# Altium PCB PCB_Project_Board_3.PcbDoc
Units mil, origin at the board's own origin, x right, y up, seen from the top; angles counter-clockwise.
Board outline 3900 x 3900 mil, 2 copper layers (Top Layer, Bottom Layer); 64 components, 47 nets, 263 pads, 57 vias.
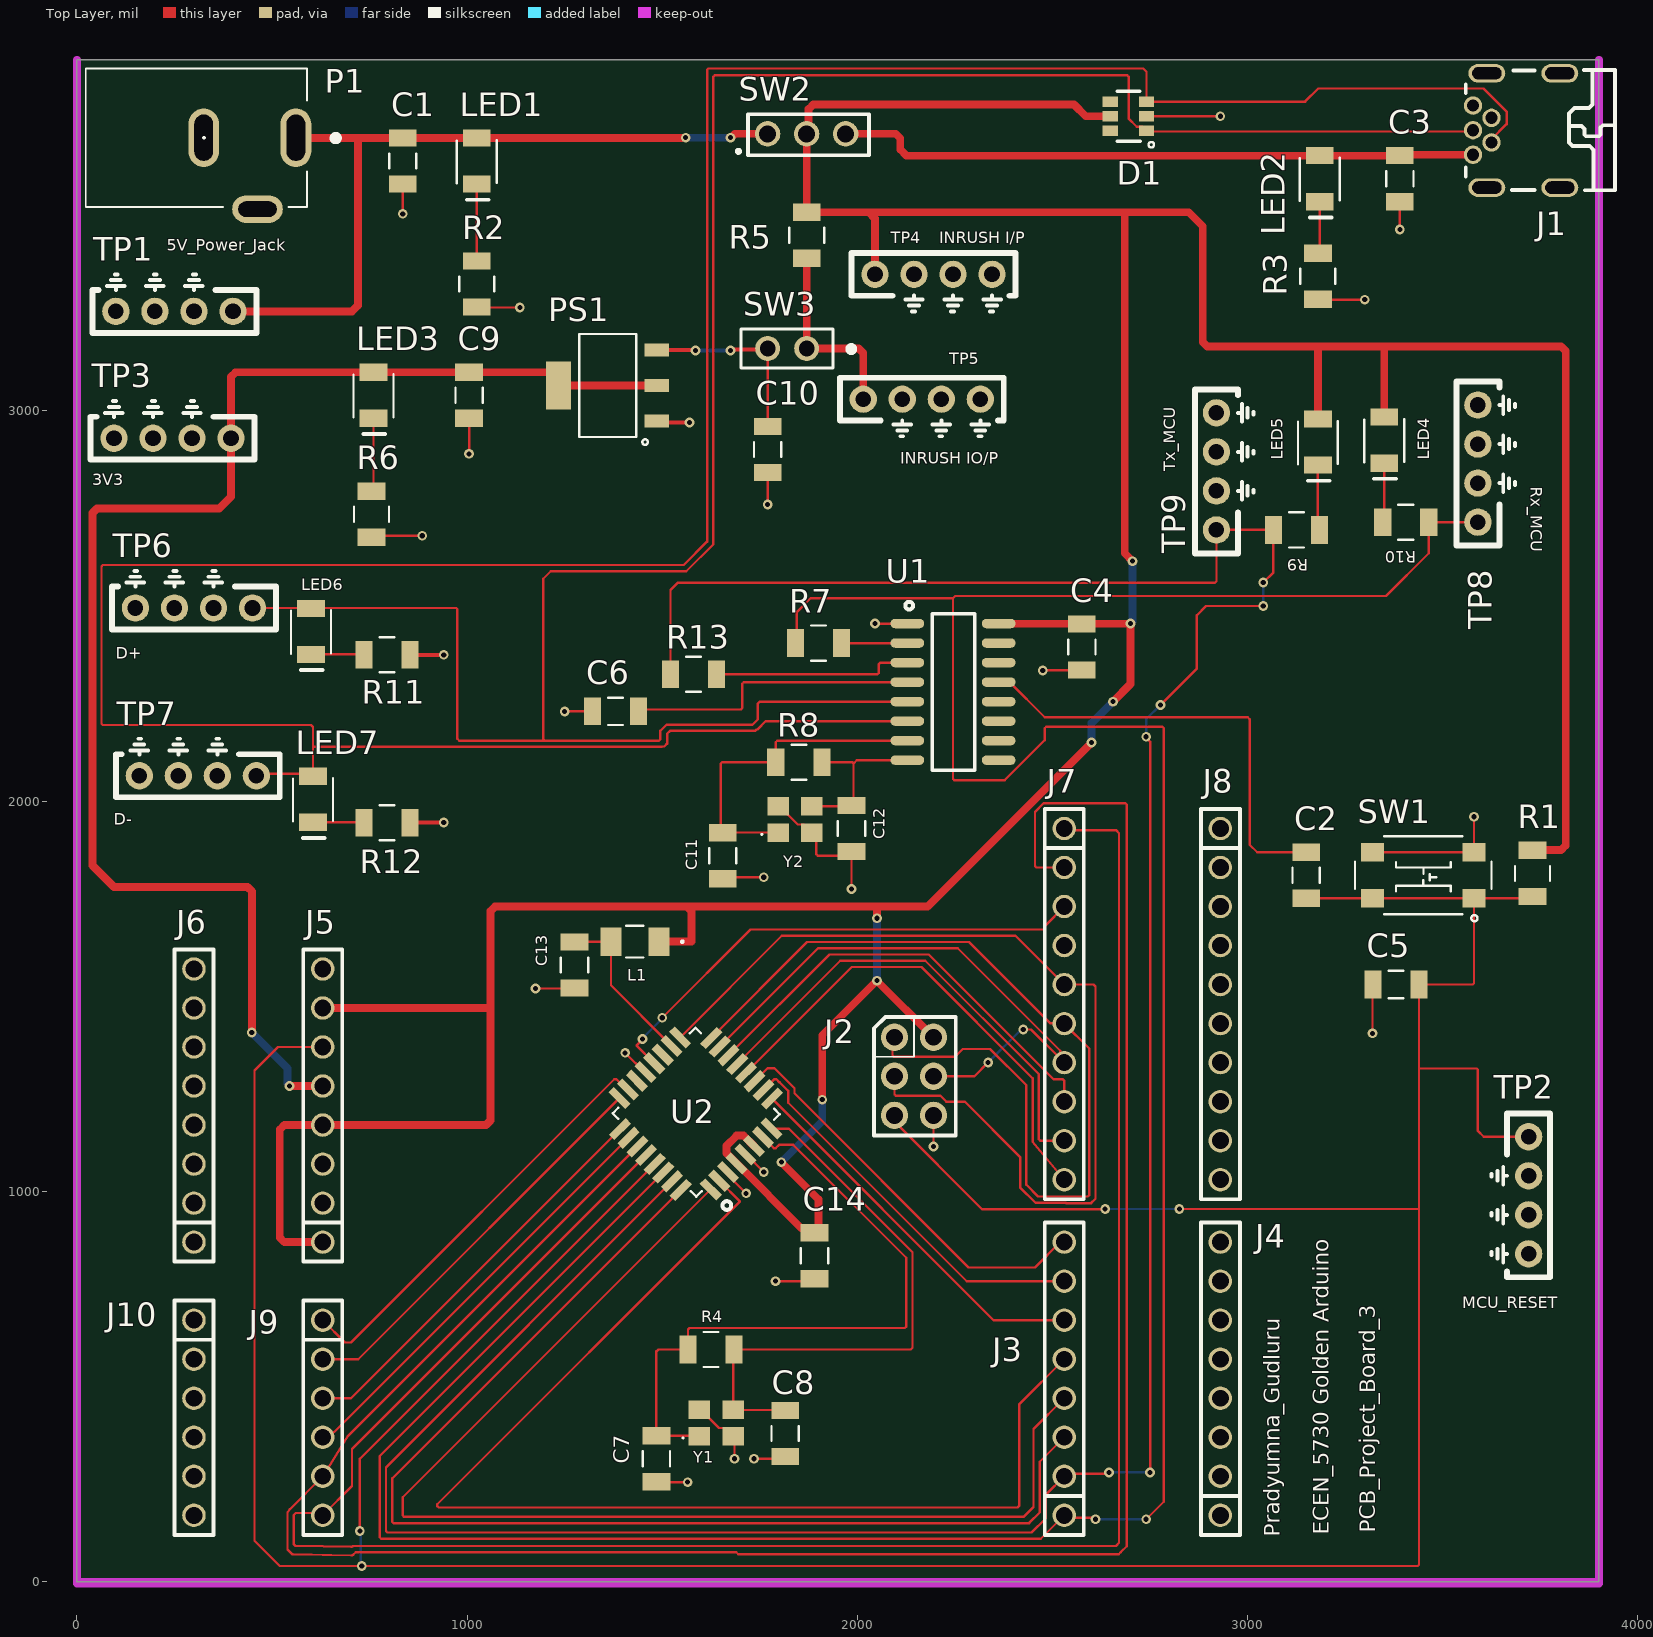
[diagram p0: Top Layer view]
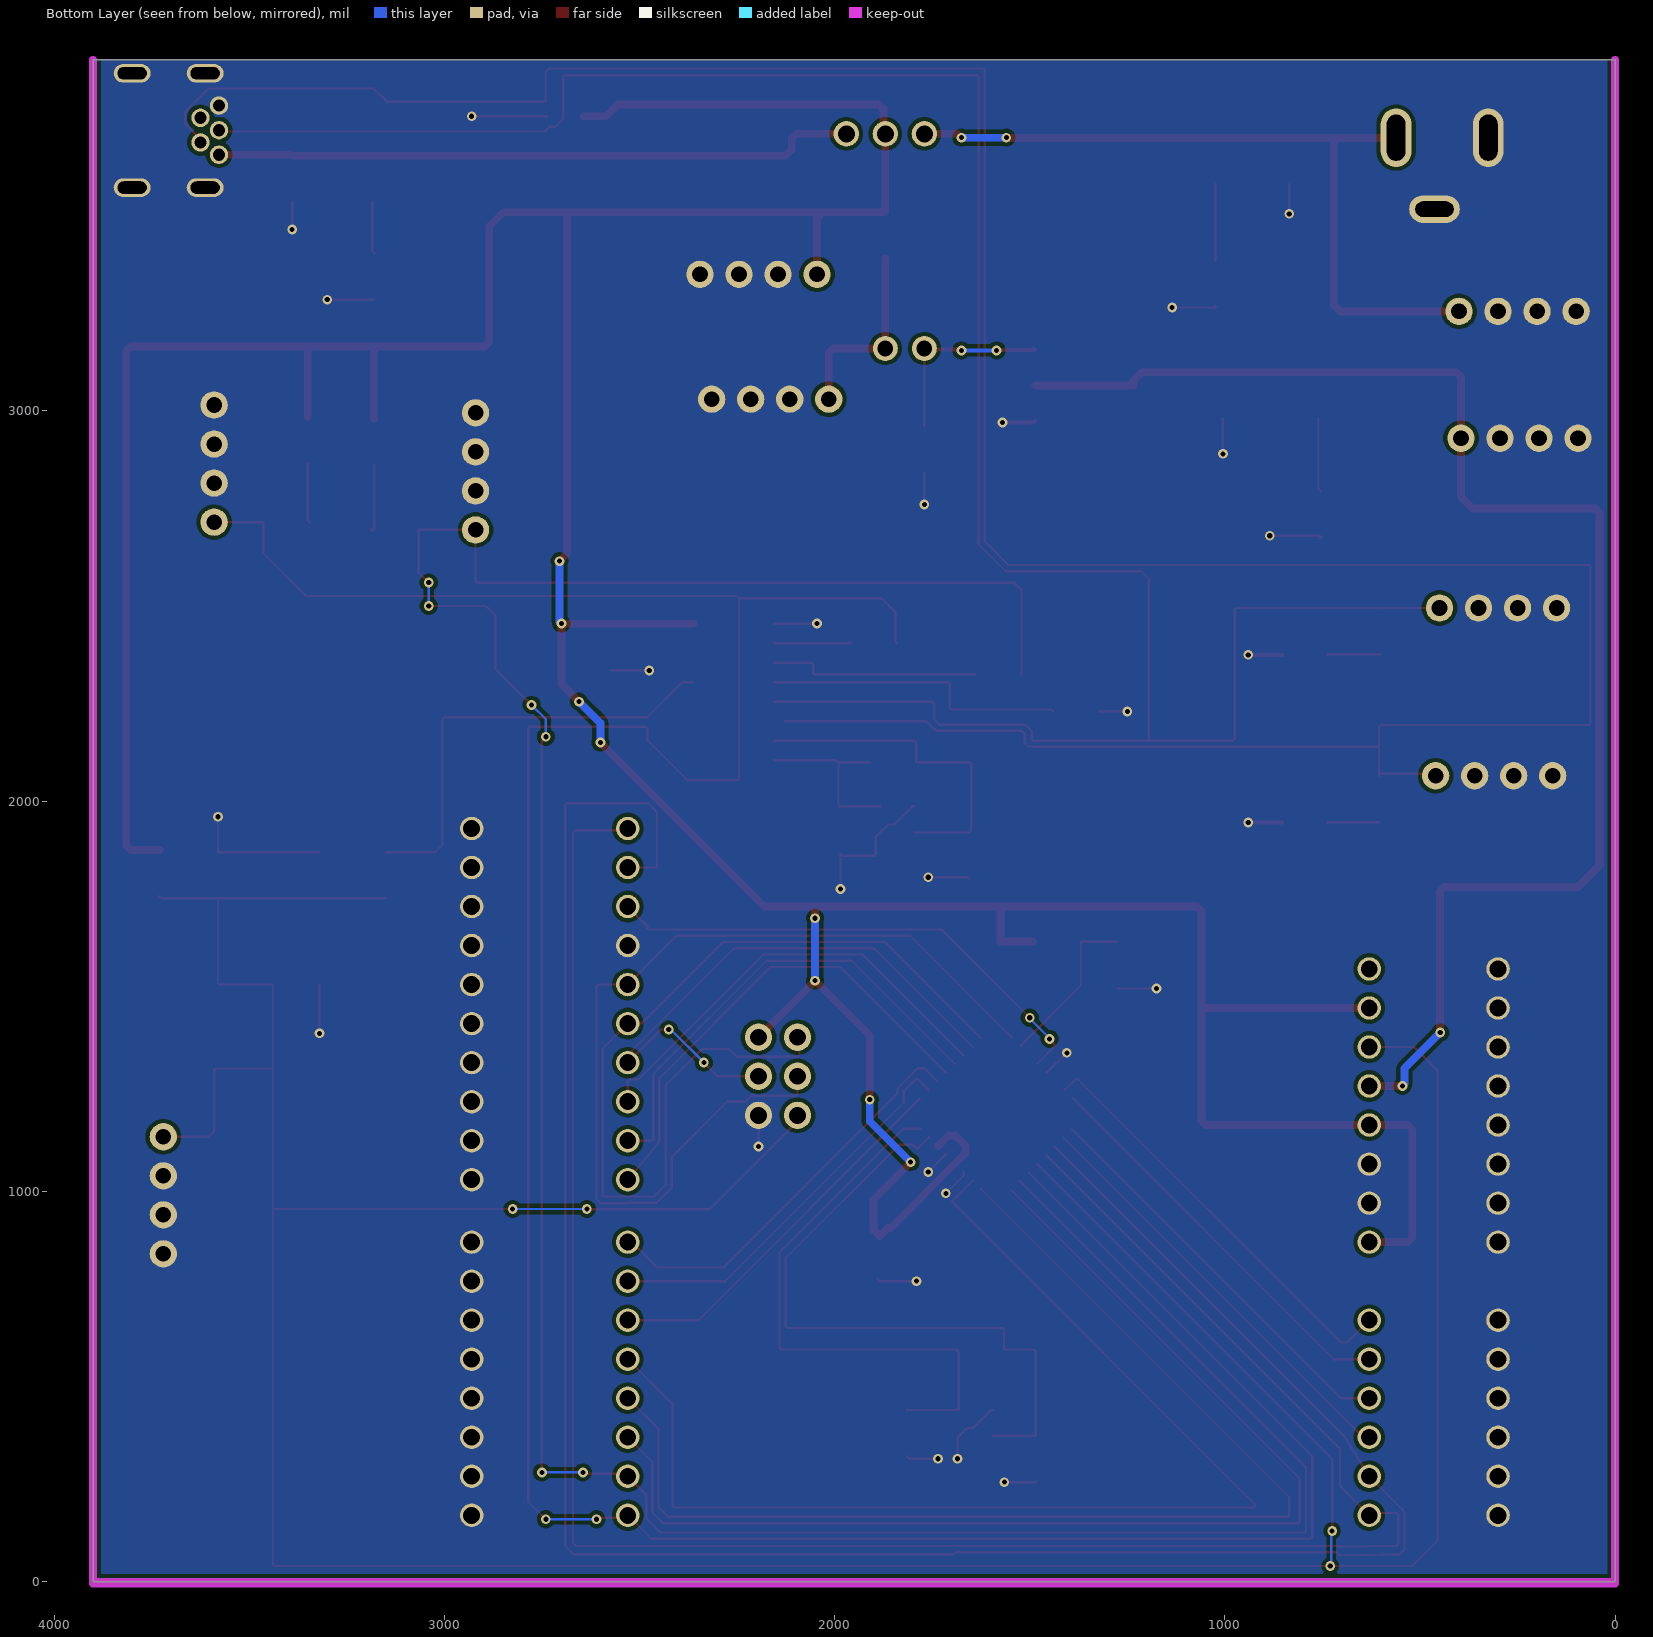
[diagram p1: Bottom Layer view, seen from below]
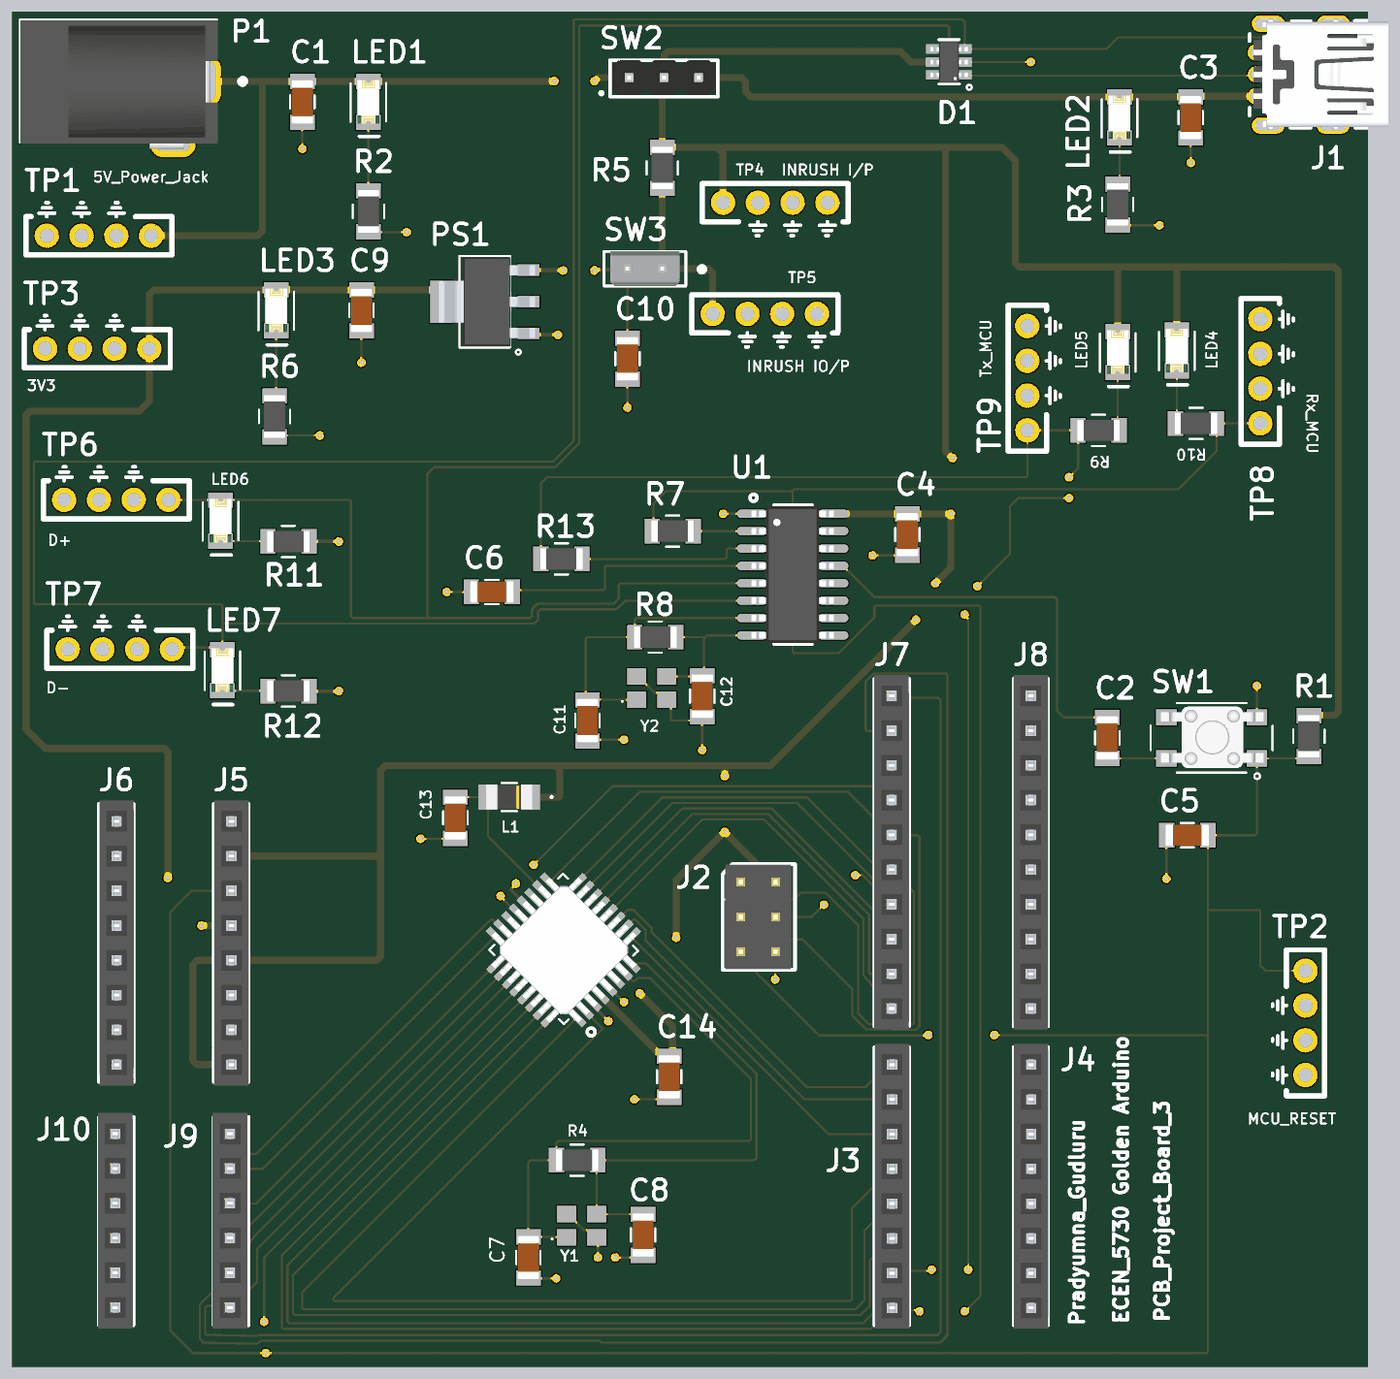
[diagram p2: 3D render of the assembled board from above, using the file's embedded part models]

## Layer stack, top to bottom
Top Solder: solder mask 0.4, Solder Resist, Dk 3.5
Top Layer: signal copper 1.4
Dielectric 1: dielectric 12.6, FR-4, Dk 4.8
Bottom Layer: signal copper 1.4
Bottom Solder: solder mask 0.4, Solder Resist, Dk 3.5

## Board outline
0,0 3900,0 3900,3900 0,3900

## Design rules (kind name [scope] priority, off if disabled: settings)
Clearance [All] p1: gap=10 ignorepadtopadclearanceinfootprint=FALSE except(0: Arc-Hole Track-Hole SMDPad-Hole THPad-Hole Via-Hole Fill-Hole Poly-Hole Region-Hole Text-Hole)
PlaneClearance [All] p1: clearance=10
PlaneConnect [All] p1: planeconnectstyle=Direct reliefexpansion=20 reliefentries=4 reliefconductorwidth=10 reliefairgap=10
PolygonConnect [All] p1: connectstyle=Direct reliefconductorwidth=10 reliefentries=4 polygonreliefangle="90 Angle" airgapwidth=10
RoutingVias [All] p1: holewidth=15 width=25 viastyle="Through Hole" minholewidth=13 minwidth=25 maxholewidth=60 maxwidth=80
SolderMaskExpansion [All] p1: expansion=4 istentingtop=FALSE
UnRoutedNet [All] p1: checkbadconnections=TRUE
Width "Schematic Width Constraint_4" [InNet('VUSB_5V')] p1: maxlimit=100 minlimit=10 preferedwidth=20 minimp=50.000000 maximp=50.000000 favimp=50.000000
Width "Schematic Width Constraint_3" [InNet('5V_Power_Jack')] p2: maxlimit=100 minlimit=10 preferedwidth=20 minimp=50.000000 maximp=50.000000 favimp=50.000000
Width "Schematic Width Constraint_2" [InNet('5V')] p3: maxlimit=100 minlimit=10 preferedwidth=20 minimp=50.000000 maximp=50.000000 favimp=50.000000
Width "Schematic Width Constraint_1" [InNet('3V3')] p4: maxlimit=100 minlimit=10 preferedwidth=20 minimp=50.000000 maximp=50.000000 favimp=50.000000
Width "Schematic Width Constraint" [InNet('NetR5_2')] p5: maxlimit=100 minlimit=10 preferedwidth=20 minimp=50.000000 maximp=50.000000 favimp=50.000000
Width [All] p6: maxlimit=10 minlimit=6 preferedwidth=6 minimp=50.000000 maximp=50.000000 favimp=50.000000
27 further rules are at their usual default settings.

## Components (designator, comment, footprint, x,y, rotation, side; value= is the part's Value field where it differs from the comment)
C1 "22uF" 1206_Passive_Capacitor 835,3640 r90 top
C2 "22uF" 1206_Passive_Capacitor 3150,1810 r270 top
C3 "22uF" 1206_Passive_Capacitor 3390,3595 r90 top
C4 "22uF" 1206_Passive_Capacitor 2575,2395 r90 top
C5 "1uF" 1206_Passive_Capacitor 3380,1530 r0 top
C6 "1uF" 1206_Passive_Capacitor 1380,2230 r0 top
C7 "22pF" 1206_Passive_Capacitor 1485,315 r90 top
C8 "22pF" 1206_Passive_Capacitor 1815,380 r90 top
C9 "22uF" 1206_Passive_Capacitor 1005,3040 r90 top
C10 "22uF" 1206_Passive_Capacitor 1770,2901 r90 top
C11 "22pF" 1206_Passive_Capacitor 1655,1860 r90 top
C12 "22pF" 1206_Passive_Capacitor 1985,1930 r90 top
C13 "22uF" 1206_Passive_Capacitor 1275,1580 r90 top
C14 "22uF" 1206_Passive_Capacitor 1890,835 r90 top
D1 "SRV05-4-P-T7" TVS 2695,3755 r180 top value="TVS DIODE 5.5V 6TSOP"
J1 "USB Mini" USB_MINI_B 3688.75,3718.55 r90 top value="USB mini B"
J2 "NRPN032PAEN-RC" ICSP 2095,1395 r0 top
J3 "8Pin Header" "8_PIN_100MIL - Female" 2530,170 r90 top value=Female
J4 "8Pin GND" "8_PIN_100MIL - Female" 2930,170 r90 top value=Female
J5 "8Pin Header" "8_PIN_100MIL - Female" 630,870 r90 top value=Female
J6 "8Pin GND" "8_PIN_100MIL - Female" 300,870 r90 top value=Female
J7 "10Pin Header" "10_PIN_100MIL - Female" 2530,1930 r270 top value=Female
J8 "10Pin GND" "10_PIN_100MIL - Female" 2930,1930 r270 top value=Female
J9 "6Pin Header" "6_PIN_100MIL -Female" 630,670 r270 top value=Female
J10 "6Pin GND" "6_PIN_100MIL -Female" 300,670 r270 top value=Female
L1 "FB_10uH_1206" AIML-1206_ABR-M 1430,1640 r180 top
LED1 "Green" LED_1206 1025,3640 r270 top
LED2 "Red" LED_1206 3185,3595 r270 top
LED3 "Blue" LED_1206 760,3040 r270 top
LED4 "Red" LED_1206 3350,2925 r270 top
LED5 "Red" LED_1206 3180,2920 r270 top
LED6 "Red" LED_1206 600,2435 r270 top
LED7 "Red" LED_1206 605,2005 r270 top
P1 "Power Jack" Power_Jack 561.22,3700 r180 top value="CONN PWR JACK 2X5.5MM SOLDER"
PS1 "AMS1117-3.3" LDO 1360,3065 r90 top value="IC REG LINEAR 3.3V 800MA SOT223"
R1 "10k" 1206_Passive_Resitor 3730,1815 r90 top value=10KOhm
R2 "1k" 1206_Passive_Resitor 1025,3325 r90 top value="1K Ohm"
R3 "1k" 1206_Passive_Resitor 3180,3345 r270 top value="1K Ohm"
R4 "1M" 1206_Passive_Resitor 1625,595 r0 top value="1M Ohm"
R5 "500m" 1206_Passive_Resitor 1870,3450 r270 top value=500mOhm
R6 "1k" 1206_Passive_Resitor 755,2735 r90 top value="1K Ohm"
R7 "100Ohm" 1206_Passive_Resitor 1900,2405 r0 top
R8 "1M" 1206_Passive_Resitor 1850,2100 r0 top value="1M Ohm"
R9 "1k" 1206_Passive_Resitor 3125,2695 r0 top value="1K Ohm"
R10 "1k" 1206_Passive_Resitor 3405,2715 r180 top value="1K Ohm"
R11 "1k" 1206_Passive_Resitor 795,2375 r180 top value="1K Ohm"
R12 "1k" 1206_Passive_Resitor 795,1945 r180 top value="1K Ohm"
R13 "100Ohm" 1206_Passive_Resitor 1580,2325 r0 top
SW1 "TL3305AF160QG" Switch_JLC 3450,1810 r180 top
SW2 "PREC003SAAN-RC" 3_PIN_100mil 1770,3710 r0 top value="CONN HEADER VERT 3POS 2.54MM"
SW3 "SW_2Pin_100mil_Switch" 2Pin-Header-Conn 1870,3160 r180 top
TP1 "Power" TP10x_Probe 250,3255 r180 top
TP2 "RST" TP10x_Probe 3720,990 r270 top
TP3 "3V3" TP10x_Probe 245,2930 r180 top
TP4 "VIN_INRUSH" TP10x_Probe 2195,3350 r0 top
TP5 "VOUT_INRUSH" TP10x_Probe 2165,3030 r0 top
TP6 "D+_TP" TP10x_Probe 300,2495 r180 top
TP7 "D-_TP" TP10x_Probe 310,2065 r180 top
TP8 "RX_MCU_TP" TP10x_Probe 3590,2865 r90 top
TP9 "TX_MCU_TP" TP10x_Probe 2920,2845 r90 top
U1 "CH340G" "USB to serial" 2245,2280 r270 top value="USB to Serial"
U2 "ATMEGA328P-ANR" ATMega328P 1585,1200 r315 top value="IC MCU 8BIT 32KB FLASH 32TQFP"
Y1 "X322516MLB4SI" "Crystal resonator" 1638.3,408.5 r0 top value=16MHz
Y2 "X322512MSB4SI" "Crystal resonator" 1840,1955 r0 top value=12MHz

## Footprints (in the part's own frame and the unit in brackets; to place one, negate y for a bottom-side part, rotate by r counter-clockwise, add the part's x,y. Pads: shape width x height; smd on the part's side, far side on the other; paste and mask are expansions set on the pad)
2Pin-Header-Conn [mm]
  round 1.62 hole 1.02: 1(0,0) 2(2.54,0)
  silkscreen extent -3.03,-1.27 4.26,1.26, body extent -1.27,-1.27 3.81,1.27, height 8.13
3_PIN_100mil [mm]
  round 1.65 hole 1.1: 1(0,0) 2(2.54,0) 3(5.08,0)
  silkscreen extent -2,-1.4 6.6,1.27, body extent -1.14,-1.27 6.48,1.27, height 8.38
"6_PIN_100MIL -Female" [mil]
  round 60 hole 43.31: 1(0,0) 2(100,0) 3(200,0) 4(300,0) 5(400,0) 6(500,0)
  silkscreen extent -50,-50 550,50, body extent -61,-53 559,47, height 335
"8_PIN_100MIL - Female" [mil]
  round 60 hole 43.31: 1(0,0) 2(100,0) 3(200,0) 4(300,0) 5(400,0) 6(500,0) 7(600,0) 8(700,0)
  silkscreen extent -50,-50 750,50, body extent -60,-51 760,49, height 335
"10_PIN_100MIL - Female" [mil]
  round 60 hole 43.31: 1(0,0) 2(100,0) 3(200,0) 4(300,0) 5(400,0) 6(500,0) 7(600,0) 8(700,0) 9(800,0) 10(900,0)
  silkscreen extent -50,-50 950,50, body extent -61,-50 959,50, height 335
1206_Passive_Capacitor [mil]
  rect 44x71 smd: 1(-59,0) 2(59,0)
  silkscreen extent -19,-35 19,35, body extent -63,-31 63,32, height 50
1206_Passive_Resitor [mil]
  rect 44x71 smd: 1(-59,0) 2(59,0)
  silkscreen extent -19,-45 19,45, body extent -61,-31 61,31, height 26
AIML-1206_ABR-M [mil]
  rect 54x73 smd paste+0 mask+0: 1(-61.5,0) 2(61.5,0)
  silkscreen extent -124,-40 22,40, body extent -66,-36 66,36, height 55
ATMega328P [mm]
  rect 1.55x0.508 smd mask+0.025: 1(4.2,-2.794) 2(4.2,-2.007) 3(4.2,-1.194) 4(4.2,-0.406) 5(4.2,0.406) 6(4.2,1.194) 7(4.2,2.007) 8(4.2,2.794) 17(-4.2,2.794) 18(-4.2,2.007) 19(-4.2,1.194) 20(-4.2,0.406) 21(-4.2,-0.406) 22(-4.2,-1.194) 23(-4.2,-2.007) 24(-4.2,-2.794)
  rect 0.508x1.55 smd mask+0.025: 9(2.843,4.2) 10(2.056,4.2) 11(1.243,4.2) 12(0.455,4.2) 13(-0.357,4.2) 14(-1.145,4.2) 15(-1.958,4.2) 16(-2.745,4.2) 25(-2.745,-4.2) 26(-1.958,-4.2) 27(-1.145,-4.2) 28(-0.357,-4.2) 29(0.455,-4.2) 30(1.243,-4.2) 31(2.056,-4.2) 32(2.843,-4.2)
  silkscreen extent -3.94,-3.81 5.97,3.94, body extent -4.45,-4.47 4.55,4.53, height 1.16
"Crystal resonator" [mil]
  rect 55.11x47.24 smd: 1(-43.3,-35.43) 2(43.31,-35.43) 3(43.32,31.5) 4(-43.3,31.5)
  silkscreen extent -87,-42 -83,-38, body extent -65,-47 65,47, height 31
ICSP [mil]
  round 70 hole 43.31: 1(0,0) 2(0,-100) 3(0,-200) 4(100,0) 5(100,-100) 6(100,-200)
  silkscreen extent -52,-252 157,52, body extent -44,-250 146,50, height 330
LDO [mil]
  rect 33x63 smd: 1(-91,-126) 2(0,-126) 3(91,-126)
  rect 122x63 smd: 4(0,126)
  silkscreen extent -152,-103 132,73, body extent -128,-144 128,132, height 73
LED_1206 [mil]
  rect 44x71 smd: 1(-59,0) 2(59,0)
  silkscreen extent -54,-51 99,51, body extent -63,-31 63,31, height 28
Power_Jack [mm]
  oval 2x3.8 hole 1.2 slot 3 at 90 deg: 1(0,0) 2(6,0)
  oval 3.3x1.8 hole 1 slot 2.5 at 0 deg: 3(2.5,4.65)
  silkscreen extent -2.79,-4.5 13.68,4.5, body extent -0.76,-4.45 13.64,4.95, height 11.49
Switch_JLC [mm]
  rect 1.5x1.2 smd: 1(-3.3,1.5) 2(3.3,1.5) 3(-3.3,-1.5) 4(3.3,-1.5)
  silkscreen extent -4.44,-2.54 4.45,3, body extent -3.8,-2.29 3.7,2.21, height 3.7
TP10x_Probe [mil] "Small Probs footprint"
  round 70 hole 40: 1(-150,0) 2(-50,0) 2(50,0) 2(150,0)
  silkscreen extent -210,-95 210,55
TVS [mm]
  rect 1x0.7 smd mask+0.025: 1(-1.162,0.95) 2(-1.162,0) 3(-1.162,-0.95) 4(1.2,-0.95) 5(1.2,0) 6(1.2,0.95)
  silkscreen extent -1.65,-1.63 0.76,2.03, body extent -1.37,-1.44 1.38,1.46, height 1.1
"USB to serial" [mil]
  oval 24x86.61 smd: 1(-175,-117) 2(-125,-117) 3(-75,-117) 4(-25,-117) 5(25,-117) 6(75,-117) 7(125,-117) 8(175,-117) 9(175,117) 10(125,117) 11(75,117) 12(25,117) 13(-25,117) 14(-75,117) 15(-125,117) 16(-175,117)
  silkscreen extent -231,-122 201,56, body extent -197,-118 197,118, height 71
USB_MINI_B [mm]
  round 1.2 hole 0.8: 1(-1.58,2.826) 2(-0.78,1.622) 3(0.02,2.826) 4(0.82,1.622) 5(1.62,2.826)
  oval 1.2x2.4 hole 0.8 slot 1.9 at 90 deg: 6(-3.72,1.924) 7(3.72,1.924) 8(-3.72,-2.826) 9(3.72,-2.826)
  silkscreen extent -3.89,-6.42 3.93,3.3, body extent -4.04,-6.83 4.06,3.02, height 3.98

## Part data
C1 C2 C3 C4 C9 C10 C13 C14: library part C_22uF_1206, "22uF ±10% 25V X5R 1206 Multilayer Ceramic Capacitors MLCC - SMD/SMT RoHS", LCSC Part#=C12891, MFR Part #=CL31A226KAHNNNE, Datasheet=https://datasheet.lcsc.com/lcsc/1811031514_Samsung-Electro-Mechanics-CL31A226KAHNNNE_C12891.pdf, Type=basic
C5 C6: library part C_1uF_1206, "MULTILAYER CERAMIC CAPACITORS MLCC - SMD/SMT 1UF 50V 1206 ROHS", LCSC Part#=C1848, MFR Part #=CL31B105KBHNNNE, Digikey Link=https://www.digikey.com/product-detail/en/C1206C105M4RACTU/399-8150-1-ND/3471873/?itemSeq=304982366, Type=Basic
C7 C8 C11 C12: library part C_22pF_1206, "22pF ±5% 1kV C0G 1206 Multilayer Ceramic Capacitors MLCC - SMD/SMT RoHS", LCSC Part#=C313096, MFR Part #=1206CG220J102NT, Datasheet=https://datasheet.lcsc.com/lcsc/1810311150_FH-Guangdong-Fenghua-Advanced-Tech-1206CG220J102NT_C313096.pdf, Type=Extended
D1: library part D_TVS_Diode, "TVS SOT-23-6 ROHS", LCSC Part#=C85364, Datasheet=https://datasheet.lcsc.com/szlcsc/ProTek-Devices-SRV05-4-P-T7_C85364.pdf, MFR Part #=SRV05-4-P-T7, Type=Basic
J1: library part J_USB_B_Mini, "Through Hole USB Connectors RoHS", LCSC Part#=C46398, MFR Part #=920-462A2021D10102, Datasheet=https://datasheet.lcsc.com/szlcsc/2103081233_Jing-Extension-of-the-Electronic-Co-920-462A2021D10102_C46398.pdf, Type=Extended
J2: library part J_ICSP, "Connector Header Through Hole 6 position 0.079\" (2.00mm)", LCSC Part#=C124384, Digikey Link=https://www.digikey.com/product-detail/en/NRPN032PAEN-RC/S5801-03-ND/804955/?itemSeq=304982355, MFR Part #=NRPN032PAEN-RC, Type=Extended
J3 J4 J5 J6: library part JF_8_PIN_FEMALE, "8 Position Header Connector 0.100\" (2.54mm) Through Hole Tin", LCSC Part#=C27438, MFR Part #=PPTC081LFBN-RC, Digikey Link=https://www.digikey.com/product-detail/en/PPTC081LFBN-RC/S7006-ND/810147/?itemSeq=304982354, Type=Extended
J7 J8: library part JF_10_PIN_FEMALE_, "10 Position Header Connector 0.100\" (2.54mm) Through Hole Tin", LCSC Part#=C225507, MFR Part #=PPTC101LFBN-RC, Digikey Link=https://www.digikey.com/product-detail/en/PPTC101LFBN-RC/S7008-ND/810149/?itemSeq=304982352, Type=Extended
J9 J10: library part JF_6_PIN_FEMALE, "6 Position Header Connector 0.100\" (2.54mm) Through Hole Tin", LCSC Part#=C40877, MFR Part #=PPTC061LFBN-RC, Digikey Link=https://www.digikey.com/product-detail/en/PPTC061LFBN-RC/S7004-ND/810145/?itemSeq=304982353, Type=Extended
L1: "25mA 10uH ±10% 800mΩ 1206  Inductors (SMD) ROHS", LCSC Part#=C1051, MFR Part #=CMI321609X100KT, Mfr_Name="FH (Guangdong Fenghua Advanced Tech)", Datasheet=https://datasheet.lcsc.com/lcsc/1810311314_FH--Guangdong-Fenghua-Advanced-Tech-CMI321609X100KT_C1051.pdf, Type=Basic
LED1: library part LED_GREEN_1206, "Green 513~528nm 1206 Light Emitting Diodes (LED) RoHS", LCSC Part#=C434439, MFR Part #=SZYY1206G, Datasheet=https://datasheet.lcsc.com/lcsc/2006301532_Yongyu-Photoelectric-SZYY1206G_C434439.pdf, Type=Extended
LED2 LED4 LED5 LED6 LED7: library part LED_RED_1206, "Red 621~631nm 1206 Light Emitting Diodes (LED) RoHS", LCSC Part#=C93133, MFR Part #=15-21/R6C-FQ1R1B/2T, Datasheet=https://datasheet.lcsc.com/szlcsc/1811151241_Everlight-Elec-15-21-R6C-FQ1R1B-2T_C93133.pdf, Type=Extended
LED3: library part LED_BLUE_1206, "blue 1206  Light Emitting Diodes (LED) ROHS", LCSC Part#=C130717, MFR Part #=NCD1206B1, Datasheet=https://datasheet.lcsc.com/lcsc/2008201033_Foshan-NationStar-Optoelectronics-NCD1206B1_C130717.pdf, Type=Extended
P1: library part "P_Power Jack", "Power Barrel Connector Jack 2.10mm ID (0.083\"), 5.50mm OD (0.217\") Through Hole, Right Angle", LCSC Part#=C136744, MFR Part #=PJ-102A, Digikey Link=https://www.digikey.com/product-detail/en/PJ-102A/CP-102A-ND/275425/?itemSeq=304982367, Type=Extended
PS1: library part PS_AMS_LDO_3v3, "LOW DROPOUT REGULATORS(LDO) POSITIVE FIXED 1.3V @ 800MA 15V 3.3V 1A SOT-223 ROHS", LCSC Part#=C6186, MFR Part #=AMS1117-3.3, Type=Basic
R1: library part R_10KOhm_1206, "10 kOhms ±5% 0.25W, 1/4W Chip Resistor 1206 (3216 Metric) Automotive AEC-Q200 Thick Film", LCSC Part#=C17902, MFR Part #=RMCF1206FT10K0, Digikey Link=https://www.digikey.com/en/products/detail/stackpole-electronics-inc/RMCF1206FT10K0/1759669, Type=Basic
R2 R3 R6 R9 R10 R11 R12: library part R_1K_1206, "CHIP RESISTOR - SURFACE MOUNT 1KOHMS ±1% 1/4W 1206 ROHS", LCSC Part#=C4410, MFR Part #=RNCP1206FTD1K00CT, Digikey Link=https://www.digikey.com/product-detail/en/RNCP1206FTD1K00/RNCP1206FTD1K00CT-ND/2240675/?itemSeq=304982373, Type=Basic
R4 R8: library part R_1M_1206, "CHIP RESISTOR - SURFACE MOUNT 1MOHMS ±1% 1/4W 1206 ROHS", LCSC Part#=C17927, MFR Part #=RMCF1206JT1M00, Digikey Link=https://www.digikey.com/product-detail/en/RMCF1206JT1M00/RMCF1206JT1M00CT-ND/1942830/?itemSeq=304982358, Type=Basic
R5: library part R_500mOhm_1206, "Resistors/Shunt 250mW 500mΩ ±800ppm/℃ ±5% 1206  Current Sense  Resistors ROHS", LCSC Part#=C247433, MFR Part #=1206W4J050KT5E, Datasheet=https://datasheet.lcsc.com/lcsc/1810301438_UNI-ROYAL-Uniroyal-Elec-1206W4J050KT5E_C247433.pdf, Type=Extended
R7 R13: library part R_100Ohm_1206, "100Ω ±1% 0.25W ±100ppm/℃ 1206 Chip Resistor - Surface Mount RoHS", LCSC Part#=C17901, MFR Part #=1206W4F1000T5E, Datasheet=https://datasheet.lcsc.com/lcsc/2206010145_UNI-ROYAL-Uniroyal-Elec-1206W4F1000T5E_C17901.pdf, Type=Basic
SW1: library part SW_Push_Button_JLC, "Tactile Switch SPST-NO Top Actuated Surface Mount", LCSC Part#=C2837550, MFR Part #=KH-4.5X4.5X4.3H-STM, Datasheet=https://datasheet.lcsc.com/lcsc/2106081532_Shenzhen-Kinghelm-Elec-KH-4.5X4.5X4.3H-STM_C2837550.pdf, Type=Extended
SW2: library part SW_3Pin_100mil_Switch, "Connector Header Through Hole 3 position 0.100\" (2.54mm)", LCSC Part#=C49257, Digikey Link=https://www.digikey.com/product-detail/en/PREC003SAAN-RC/S1012EC-03-ND/2774851/?itemSeq=304982371, MFR Part #=PREC003SAAN-RC, Type=Extended
SW3: "2Pin Header", LCSC Part#=C124375, Type=Extended
TP1 TP2 TP3 TP4 TP5 TP6 TP7 TP8 TP9: library part TP_10x_Probe, "Test Point 300 mil centers"
U1: library part U_USBtoSerial, "Transceiver USB 2.0 2Mbps SOP-16_150mil USB ICs RoHS", LCSC Part#=C14267, Datasheet=https://datasheet.lcsc.com/lcsc/2008191806_WCH-Jiangsu-Qin-Heng-CH340G_C14267.pdf, MFR Part #=CH340G, Type=Basic
U2: library part U_ATMega328P, "AVR AVR® ATmega Microcontroller IC 8-Bit 20MHz 32KB (16K x 16) FLASH 32-TQFP (7x7)", LCSC Part#=C14877, MFR Part #=ATMEGA328P-AU, Digikey Link=https://www.digikey.com/product-detail/en/ATMEGA328P-ANR/ATMEGA328P-ANRCT-ND/2774230/?itemSeq=304982365, Type=Basic
Y1: library part X_16Mhz_Res, "±10ppm 16000000Hz -40℃~85℃ 贴片无源晶振 60Ω 9pF SMD3225-4P Crystals ROHS", LCSC Part#=C13738, MFR Part #=X322516MLB4SI, Type=Basic
Y2: library part X_12MHz_Res, "SMD Crystal Resonators 12MHz ±10ppm SMD-3225_4P RoHS", LCSC Part#=C9002, Datasheet=https://datasheet.lcsc.com/szlcsc/Yangxing-Tech-X322512MSB4SI_C9002.pdf, MFR Part #=X322512MSB4SI, Type=Basic

## Via types
v1: diameter 25, hole 13, Top Layer to Bottom Layer, 57 vias

## Nets (pads, with @x,y where several pads share a name; then routed paths per layer and width w, separated by ;. In a path a pad name is that pad's centre, name@x,y a point inside that pad or via, vN(x,y) a via of type N, cw(c..) or ccw(c..) an arc to the next point about the centre after c; other vN are vias at no path point)
3V3: C9.2 J5.5 LED3.1 PS1.2 PS1.4 TP3.1 | length 3760.6
  Top Layer w20: v1(448.08,1407.02) 449.04,1407.98 449.04,1768.28 437.32,1780 95,1780 40,1835 40,2738.28 51.72,2750 365,2750 395,2780 TP3.1 395,3087.28 406.72,3099 LED3.1 C9.2 1212.5,3099 1234,3077.5 PS1.4 PS1.2 ; v1(545,1270) J5.5
  Bottom Layer w20: v1(448.08,1407.02) 540,1315.11 540,1276.35 545,1271.35 v1(545,1270)
5V: C4.2 C14.2 D1.5 J2.4 J5.1 J5.4 J5.7 L1.1 LED4.1 LED5.1 R1.2 R5.1 SW2.2 TP4.1 U1.16 U2.4 U2.6 | length 12383
  Top Layer w20: J5.1 531.72,870 520,881.72 520,1158.28 531.72,1170 J5.4 1048.28,1170 1060,1181.72 1060,1470 ; J5.7 1060,1470 ; L1.1 1575,1640 1575,1718.28 1563.28,1730 ; U2.6 1708.43,1143.04 1690.45,1143.04 1664.59,1117.18 1664.59,1097.78 U2.4 1856.37,906 1864.5,906 1885,885.5 1900,900.5 1900,980 v1(1805,1075) ; R5.1@1873,3512 R5.1 2029,3509 ; R5.1@1875,3514 1870,3519 SW2.2 1875,3715 1875,3773.28 1886.72,3785 2555,3785 2585,3755 D1.5@2642.76,3755 ; v1(1910,1235) 1910,1400 v1(2050,1540) J2.4 ; TP4.1 2045,3493 2029,3509 ; v1(2050,1700) 2050,1730 ; U1.16 2362.5,2454.5 2699.5,2454.5 v1(2700,2455) 2700,2300 v1(2655,2255) ; v1(2600,2150) 2180,1730 2050,1730 ; v1(2705,2615) 2685,2635 2685,3509 ; LED5.1 3180,3160 3175,3165 ; LED4.1 3350,3160 3345,3165 ; R1.2 3731,1875 3803.28,1875 3815,1886.72 3815,3153.28 3803.28,3165 3345,3165 ; 1060,1470 1060,1718.28 1071.72,1730 1563.28,1730 ; 1563.28,1730 2050,1730 ; 2029,3509 2685,3509 ; 2685,3509 2849,3509 2885,3473 2885,3176.72 2896.72,3165 3175,3165 ; 3175,3165 3345,3165
  Bottom Layer w20: v1(1805,1075) 1910,1180 v1(1910,1235) ; v1(2050,1540) v1(2050,1700) ; v1(2600,2150) 2600,2200 v1(2655,2255) ; v1(2700,2455) 2705,2460 v1(2705,2615)
5V_Power_Jack: C1.2 LED1.1 P1.1 SW2.1 TP1.1 | length 1976.7
  Top Layer w15: P1.1 P1.1@562.22,3699
  Top Layer w20: TP1.1 705,3255 720,3270 720,3699 ; P1.1@562.22,3699 720,3699 ; v1(1560,3700) 1550,3700 1549,3699 LED1.1 C1.2 720,3699 ; v1(1675,3700) 1676.35,3700 1686.35,3710 SW2.1 SW2.1@1764.5,3704.5
  Bottom Layer w20: v1(1560,3700) v1(1675,3700)
AD0: J9.1 U2.23 | length 1096.4
  Top Layer w6: J9.1 687.32,612.68 702.29,612.68 1377.13,1287.51 1382.49,1287.51 1408.94,1261.06 U2.23
AD1: J9.2 U2.24 | length 1047.5
  Top Layer w6: J9.2@630,580 J9.2 721.15,570 U2.24
AD2: J9.3 U2.25 | length 1047.3
  Top Layer w6: J9.3 702.16,470 U2.25
AD3: J9.4 U2.26 | length 1101.5
  Top Layer w6: J9.4 644.61,370 658.19,383.57 659.58,383.57 U2.26
AD4/SDA: J7.2 J9.5 U2.27 | length 5926
  Top Layer w6: U2.27 694.76,373.5 633.51,273.52 J9.5 545.76,185.76 539.83,177.45 539.83,82.71 552.71,69.83 703.39,67.05 ccw(c703.5,73.05) 707.74,68.8 714.44,75.5 1689.43,75.5 1694.52,70.41 2669.52,70.41 2674.89,75.78 2690,90.89 2690,1991.49 2686.49,1995 2477.53,1995 2455,1972.47 2455,1833.51 2458.51,1830 J7.2
AD5/SCL: J7.1 J9.6 U2.28 | length 5503.4
  Top Layer w6: U2.28 704.83,339.73 704.83,244.83 J9.6 621.65,170 615.83,175.83 560.83,175.83 555.83,170.83 555.83,95.79 557.58,94.03 559.29,92.32 703.26,89.55 ccw(c703.38,95.55) 707.62,91.31 707.81,91.5 2662.31,91.5 2670.5,99.69 2670.5,1917.64 2662.31,1925.83 2534.17,1925.83 J7.1
AREF: J7.3 U2.20 | length 1314.6
  Top Layer w6: v1(1449.25,1390.75) 1449.25,1389.28 1433.8,1373.83 U2.20 ; v1(1500,1445) 1726,1671 2476.91,1671 2480.43,1674.51 2480.43,1680.43 J7.3
  Bottom Layer w6: v1(1449.25,1390.75) 1449.25,1392.5 1500,1443.25 v1(1500,1445)
AVCC: C13.2 L1.2 U2.18 | length 425.5
  Top Layer w6: C13.2 1276,1640 L1.2 1368.5,1528.22 U2.18
CH_XTAL1: C11.2 R8.1 U1.7 Y2.1 | length 880.9
  Top Layer w6: Y2.1 1655.57,1919.57 C11.2 1650,1924 1650,2096.49 1653.51,2100 R8.1 1791,2151.49 1794.51,2155 U1.7@2155,2155
CH_XTAL2: C12.2 R8.2 U1.8 Y2.3 | length 468.3
  Top Layer w6: Y2.3 1982.5,1986.5 1985,1984 1990,1989 1990,2096.49 ; R8.2 1986.49,2100 1990,2096.49 ; U1.8@2155,2105 1998.51,2105 1990,2096.49
D+: D1.1 J1.3 LED6.1 TP6.1 U1.5 | length 6277.4
  Top Layer w6: TP6.1 599,2495 LED6.1 601,2495 971.49,2495 975,2491.49 975,2160 980,2155 1200,2155 ; U1.5@2155,2255 U1.5 1750,2255 1745,2250 1745,2210 1731,2196 1511,2196 1495,2180 1495,2158.51 1491.49,2155 1200,2155 ; D1.1@2740.77,3715.96 J1.3@3574.13,3715.96 ; D1.1 2730.15,3728.22 2715.7,3728.22 2695,3748.92 2695,3856.49 2691.49,3860 1634.51,3860 1631,3856.49 1631,2658.37 1561.63,2589 1214,2589 1195,2570 1195,2160 1200,2155
  Top Layer w10: J1.3@3574.13,3715.96 J1.3
D-: D1.3 J1.2 LED7.1 TP7.1 U1.6 | length 7832.6
  Top Layer w6: TP7.1@460,2070 LED7.1@602,2070 ; LED7.1 605,2138.49 ; U1.6 1765,2205 1743.69,2183.69 1741.31,2183.69 1737.63,2180 1520,2180 1512.5,2172.5 1512.5,2147.5 1505,2140 1499.11,2140 1498.11,2139 605.51,2139 605,2138.49 ; J1.2 3624.88,3696.2 3663.5,3734.82 3663.5,3766.82 3604.38,3825.94 3180.78,3825.94 3147.24,3792.4 D1.3 2740.77,3869.23 2732.49,3877.51 1618.51,3877.51 1615,3874 1615,2665 1555,2605 66.51,2605 63,2601.49 63,2198.51 66.51,2195 600,2195 605,2190 605,2138.49
DTR: C2.1 U1.13 | length 1156.9
  Top Layer w6: U1.13 2390,2305 2480,2215 3000,2215 3005,2210 3005,1888.51 3024.51,1869 C2.1
GND: C1.1 C3.1 C4.1 C5.1 C6.1 C7.1 C8.1 C9.1 C10.1 C11.1 C12.1 C13.1 C14.1 D1.2 J1.5 J1.6 J1.7 J1.8 J1.9 J2.6 J4.1 J4.2 J4.3 J4.4 J4.5 J4.6 J4.7 J4.8 J5.2 J5.3 J6.1 J6.2 J6.3 J6.4 J6.5 J6.6 J6.7 J6.8 J7.4 J8.1 J8.2 J8.3 J8.4 J8.5 J8.6 J8.7 J8.8 J8.9 J8.10 J10.1 J10.2 J10.3 J10.4 J10.5 J10.6 P1.2 P1.3 PS1.1 R2.1 R3.2 R6.1 R11.1 R12.1 SW1.3 SW1.4 TP1.2 TP2.2 TP3.2 TP4.2 TP5.2 TP6.2 TP7.2 TP8.2 TP9.2 U1.1 U2.3 U2.5 U2.21 Y1.2 Y1.4 Y2.2 Y2.4 | length 3189.9
  Top Layer w6: R6.1@759,2680 v1(885,2680) ; v1(835,3505) C1.1 ; v1(1005,2890) C9.1 ; R2.1@1026,3265 v1(1135,3265) ; v1(1175,1520) 1274,1520 C13.1 ; v1(1250,2230) C6.1 ; v1(1405,1355) 1454.39,1305.61 U2.21 ; C7.1 1486,255 v1(1565,255) ; Y1.4 1598.93,440 1645.24,393.69 1660.99,393.69 Y1.2 1685,369.68 v1(1685,315) ; C11.1 1659,1805 v1(1760,1805) ; U2.3 1668.69,1041.31 v1(1715,995) ; U2.5 1715.61,1094.39 v1(1760,1050) ; v1(1735,315) 1809,315 C8.1 ; v1(1770,2760) C10.1 ; v1(1790,770) 1884,770 C14.1 ; Y2.4 1800.63,1986.5 1846.94,1940.19 1862.69,1940.19 Y2.2 1895,1907.88 1895,1863.51 1898.51,1860 1979,1860 1985,1866 v1(1985,1775) ; v1(2045,2455) U1.1 U1.1@2155,2455 ; v1(2195,1115) J2.6 ; v1(2475,2335) 2574,2335 C4.1 ; D1.2@2735.77,3755 D1.2 v1(2930,3755) ; R3.2 3181,3285 v1(3300,3285) ; v1(3320,1405) 3320,1529 C5.1 ; SW1.4 SW1.3 3580,1869.13 v1(3580,1960) ; v1(3390,3465) C3.1
  Top Layer w10: R6.1 R6.1@759,2680 ; R12.1 v1(940,1945) ; R11.1 v1(940,2375) ; R2.1 R2.1@1026,3265 ; PS1.1 1490,2970 v1(1570,2970)
IO2: J3.3 U2.32 | length 3047.3
  Top Layer w6: U2.32 808,264.71 808,153.51 811.51,150 2440,150 2467.08,177.08 2467.08,307.08 J3.3
IO3: J3.4 U2.1 | length 3102.2
  Top Layer w6: U2.1 835,216.15 835,169.51 838.51,166 2426,166 2451.08,191.08 2451.08,391.08 J3.4
IO4: J3.5 U2.2 | length 3094.6
  Top Layer w6: U2.2 1699.15,974.12 923.51,198.49 923.51,193.51 927.03,190 2410,190 2415,195 2415,455 J3.5
IO5: J3.6 U2.9 | length 984.1
  Top Layer w6: U2.9 2348.85,670 J3.6
IO6: J3.7 U2.10 | length 1014.8
  Top Layer w6: U2.10 1787.24,1287.79 1792.21,1287.79 1800.58,1279.42 1800.96,1279.42 1822.72,1257.67 1822.72,1227.28 2280,770 J3.7
IO7: J3.8 U2.11 | length 1053.2
  Top Layer w6: U2.11 1769.61,1315.42 1787.59,1315.42 1838.72,1264.29 1838.72,1251.28 2285,805 2455,805 2520,870 J3.8
IO8: J7.10 U2.12 | length 1254
  Top Layer w6: U2.12 1985.36,1575 2164,1575 2449,1290 2449,1126.89 J7.10
IO9: J7.9 U2.13 | length 1235.9
  Top Layer w6: U2.13 1956.1,1591 2174,1591 2465,1300 2465,1133.51 2468.51,1130 J7.9
MCU_RESET: C2.2 C5.2 J2.3 J5.6 R1.1 SW1.1 SW1.2 TP2.1 U2.29 | length 10090
  Top Layer w6: J5.6 515,1370 455,1310 455,105 520,40 v1(730,40) 3435.49,40 3439,43.51 3439,955 ; v1(725,130) 725,314.64 U2.29 ; J2.3 2095,1178.94 2319.94,954 2634,954 v1(2635,955) ; v1(2825,955) 3439,955 ; C2.2 3320.02,1751 SW1.2 SW1.1 ; TP2.1 3605,1140 3590,1155 3590,1311.49 3586.49,1315 3439,1315 ; R1.1 3724.94,1750.94 SW1.1 ; 3439,955 3439,1315 ; 3439,1315 C5.2 3576.41,1530 3579.92,1533.51 SW1.1
  Bottom Layer w6: v1(725,130) 727.5,127.5 727.5,42.5 v1(730,40) ; v1(2635,955) v1(2825,955)
MCU_XTAL1: C7.2 R4.1 U2.7 Y1.1 | length 1701.5
  Top Layer w6: Y1.1 1594.07,374 C7.2 1485,590 1490,595 R4.1 1566,646.49 1569.51,650 2121.49,650 2125,653.51 2125,830 1835.79,1119.21 1799.21,1119.21 1790.85,1110.85 1785.88,1110.85 U2.7
MCU_XTAL2: C8.2 R4.2 U2.8 Y1.3 | length 1484.2
  Top Layer w6: R4.2 1686.5,595 2136.49,595 2141,599.51 2141,844 1824.14,1160.86 U2.8 ; R4.2@1686.5,592.5 1681.62,587.62 Y1.3 1814,440 C8.2
MISO: J2.1 J7.6 U2.16 | length 2428.5
  Top Layer w6: U2.16 1871.17,1639 2286,1639 2494.51,1430.49 2529.51,1430.49 2594,1366 2594,990.51 2590.49,987 2463,987 2433,1017 2433,1272 2340,1365 2270,1365 2250,1345 2093.51,1345 2090,1348.51 2090,1390 J2.1
MOSI: J2.5 J7.7 U2.15 | length 1525.2
  Top Layer w6: U2.15 1899.01,1623 2257,1623 2519.67,1360.33 J7.7@2519.67,1340.33 ; J2.5 2300,1295 v1(2335,1330) ; v1(2425,1415) 2445,1415 J7.7@2519.67,1340.33 ; J7.7 J7.7@2519.67,1340.33
  Bottom Layer w6: v1(2335,1330) 2420,1415 v1(2425,1415)
NetC6_2: C6.2 U1.4 | length 783.7
  Top Layer w6: C6.2 1444,2235 1701.49,2235 1705,2238.51 1705,2301 1709,2305 U1.4@2155,2305
NetC10_2: C10.2 PS1.3 SW3.2 | length 492.1
  Top Layer w6: C10.2 SW3.2
  Top Layer w10: PS1.3@1490,3160 PS1.3 1584,3156 v1(1585,3155) ; v1(1675,3155) 1677.5,3157.5 1767.5,3157.5 SW3.2
  Bottom Layer w10: v1(1585,3155) v1(1675,3155)
NetLED1_2: LED1.2 R2.2 | length 197
  Top Layer w6: R2.2 LED1.2
NetLED2_2: LED2.2 R3.1 | length 134.1
  Top Layer w6: R3.1 3185,3409 LED2.2
NetLED3_2: LED3.2 R6.2 | length 189.1
  Top Layer w6: R6.2 760,2799 LED3.2
NetLED4_2: LED4.2 R10.2 | length 152.7
  Top Layer w6: R10.2 3350,2719 LED4.2
NetLED5_2: LED5.2 R9.2 | length 169.1
  Top Layer w6: LED5.2 3180,2699 R9.2
  Top Layer w10: R9.2 R9.2@3185,2696
NetLED6_2: LED6.2 R11.2 | length 136.4
  Top Layer w6: LED6.2 735,2376 R11.2
NetLED7_2: LED7.2 R12.2 | length 131.4
  Top Layer w6: LED7.2 735,1946 R12.2
NetR5_2: R5.2 SW3.1 TP5.1 | length 499.1
  Top Layer w20: R5.2 SW3.1 2003.28,3160 2015,3148.28 TP5.1
NetR7_2: R7.2 U1.2 | length 196
  Top Layer w6: R7.2 U1.2@2155,2405
NetR13_2: R13.2 U1.3 | length 541.9
  Top Layer w6: R13.2 2051.49,2325 2055,2328.51 2055,2351.49 2058.51,2355 U1.3@2155,2355
RX_MCU: J3.1 R7.1 R10.1 TP8.1 U2.30 | length 8324.9
  Top Layer w6: U2.30 776,321.8 776,114 780,110 2470,110 J3.1 2536.36,163.64 2606.36,163.64 v1(2610,160) ; R7.1 1845,2409 1845,2485 1880,2520 2245,2520 ; v1(2740,160) 2785,205 2785,2186.99 2781.49,2190.5 2484.01,2190.5 2480,2186.49 2480,2156.34 2377.15,2053.49 2248.51,2053.49 2245,2057 2245,2520 ; TP8.1 R10.1 3464,2635 3354.5,2525.5 2250.5,2525.5 2245,2520
  Bottom Layer w6: v1(2610,160) v1(2740,160)
SCK: J2.2 J7.5 U2.17 | length 2496.6
  Top Layer w6: U2.17 1806.15,1655 2405,1655 J7.5 2605,1530 2610,1525 2610,981.06 2598.94,970 2537.32,970 2535,970 2534,971 2456.37,971 2417,1010.37 2417,1088 2275,1230 2227.88,1230 2212.88,1245 2098.51,1245 2095,1248.51 J2.2
SS: J7.8 U2.14 | length 1154.4
  Top Layer w6: U2.14 1928.26,1607 2183,1607 2503,1287 2526.49,1287 2527.59,1286.18 cw(c2524,1281.37) 2528.67,1285.13 2530,1283.49 J7.8
TX_MCU: J3.2 R9.1 R13.1 TP9.1 U2.31 | length 7800.7
  Top Layer w6: R13.1 1521,2541 1540,2560 2916.49,2560 2920,2563.51 TP9.1 R9.1 3066,2586 v1(3040,2560) ; U2.31 792,292.55 792,129.51 795.51,126 2446.49,126 2483.08,162.59 2483.08,223.08 J3.2 2536.36,276.36 2641.36,276.36 v1(2645,280) ; v1(2740,2165) 2740,2161.99 2750,2151.99 v1(2750,280) ; v1(2776.37,2246.64) 2776.64,2246.64 2870,2340 2870,2476.49 2893.51,2500 v1(3040,2500)
  Bottom Layer w6: v1(2645,280) v1(2750,280) ; v1(2740,2165) 2740,2210.27 v1(2776.37,2246.64) ; v1(3040,2500) v1(3040,2560)
VUSB_5V: C3.2 J1.1 LED2.1 SW2.3 | length 1639.9
  Top Layer w20: SW2.3 2098.28,3710 2110,3698.28 2110,3670 2126,3654 LED2.1 C3.2 ; C3.2@3397.34,3656.34 J1.1
pads on no net: D1.4 D1.6 J1.4 J5.8 U1.9 U1.10 U1.11 U1.12 U1.14 U1.15 U2.19 U2.22

## Polygon pours and split planes (outlines as drawn)
GND on Bottom Layer "NONET_L-01_P-001" (solid, pour order 0): 0,3900 3900,3900 3900,0 0,0

## Keep-outs
Keep-Out Layer:
  lines w20: 0,-5 3900,-5 ; 0,3900 0,0 3900,0 3900,3900

## Silkscreen, mask and mechanical layers (free items; w line width, h text height)
Top Overlay:
  text "INRUSH I/P" at 2210,3430 h30
  text "5V_Power_Jack" at 230,3410 h30
  text "INRUSH IO/P" at 2110,2865 h30
  text "Tx_MCU" at 2815,2845 h30 r90
  text "3V3" at 40,2810 h30
  text "Rx_MCU" at 3725,2805 h30 r270
  text "D+" at 100,2365 h30
  text "D-" at 95,1940 h30
  text "MCU_RESET" at 3550,700 h30
  text "PCB_Project_Board_3" at 3326.67,125 h40 r90
  text "ECEN_5730 Golden Arduino" at 3208.34,120 h40 r90
  text "Pradyumna_Gudluru" at 3081.67,115 h40 r90